# Altium PCB board_layout.pcbdoc
Units mm, origin at the board's own origin, x right, y up, seen from the top; angles counter-clockwise.
Board outline 92.15 x 89.13 mm, 2 copper layers (Top Layer, Bottom Layer), stack 1.57 mm thick; 20 components, 12 nets, 60 pads, 6 vias.
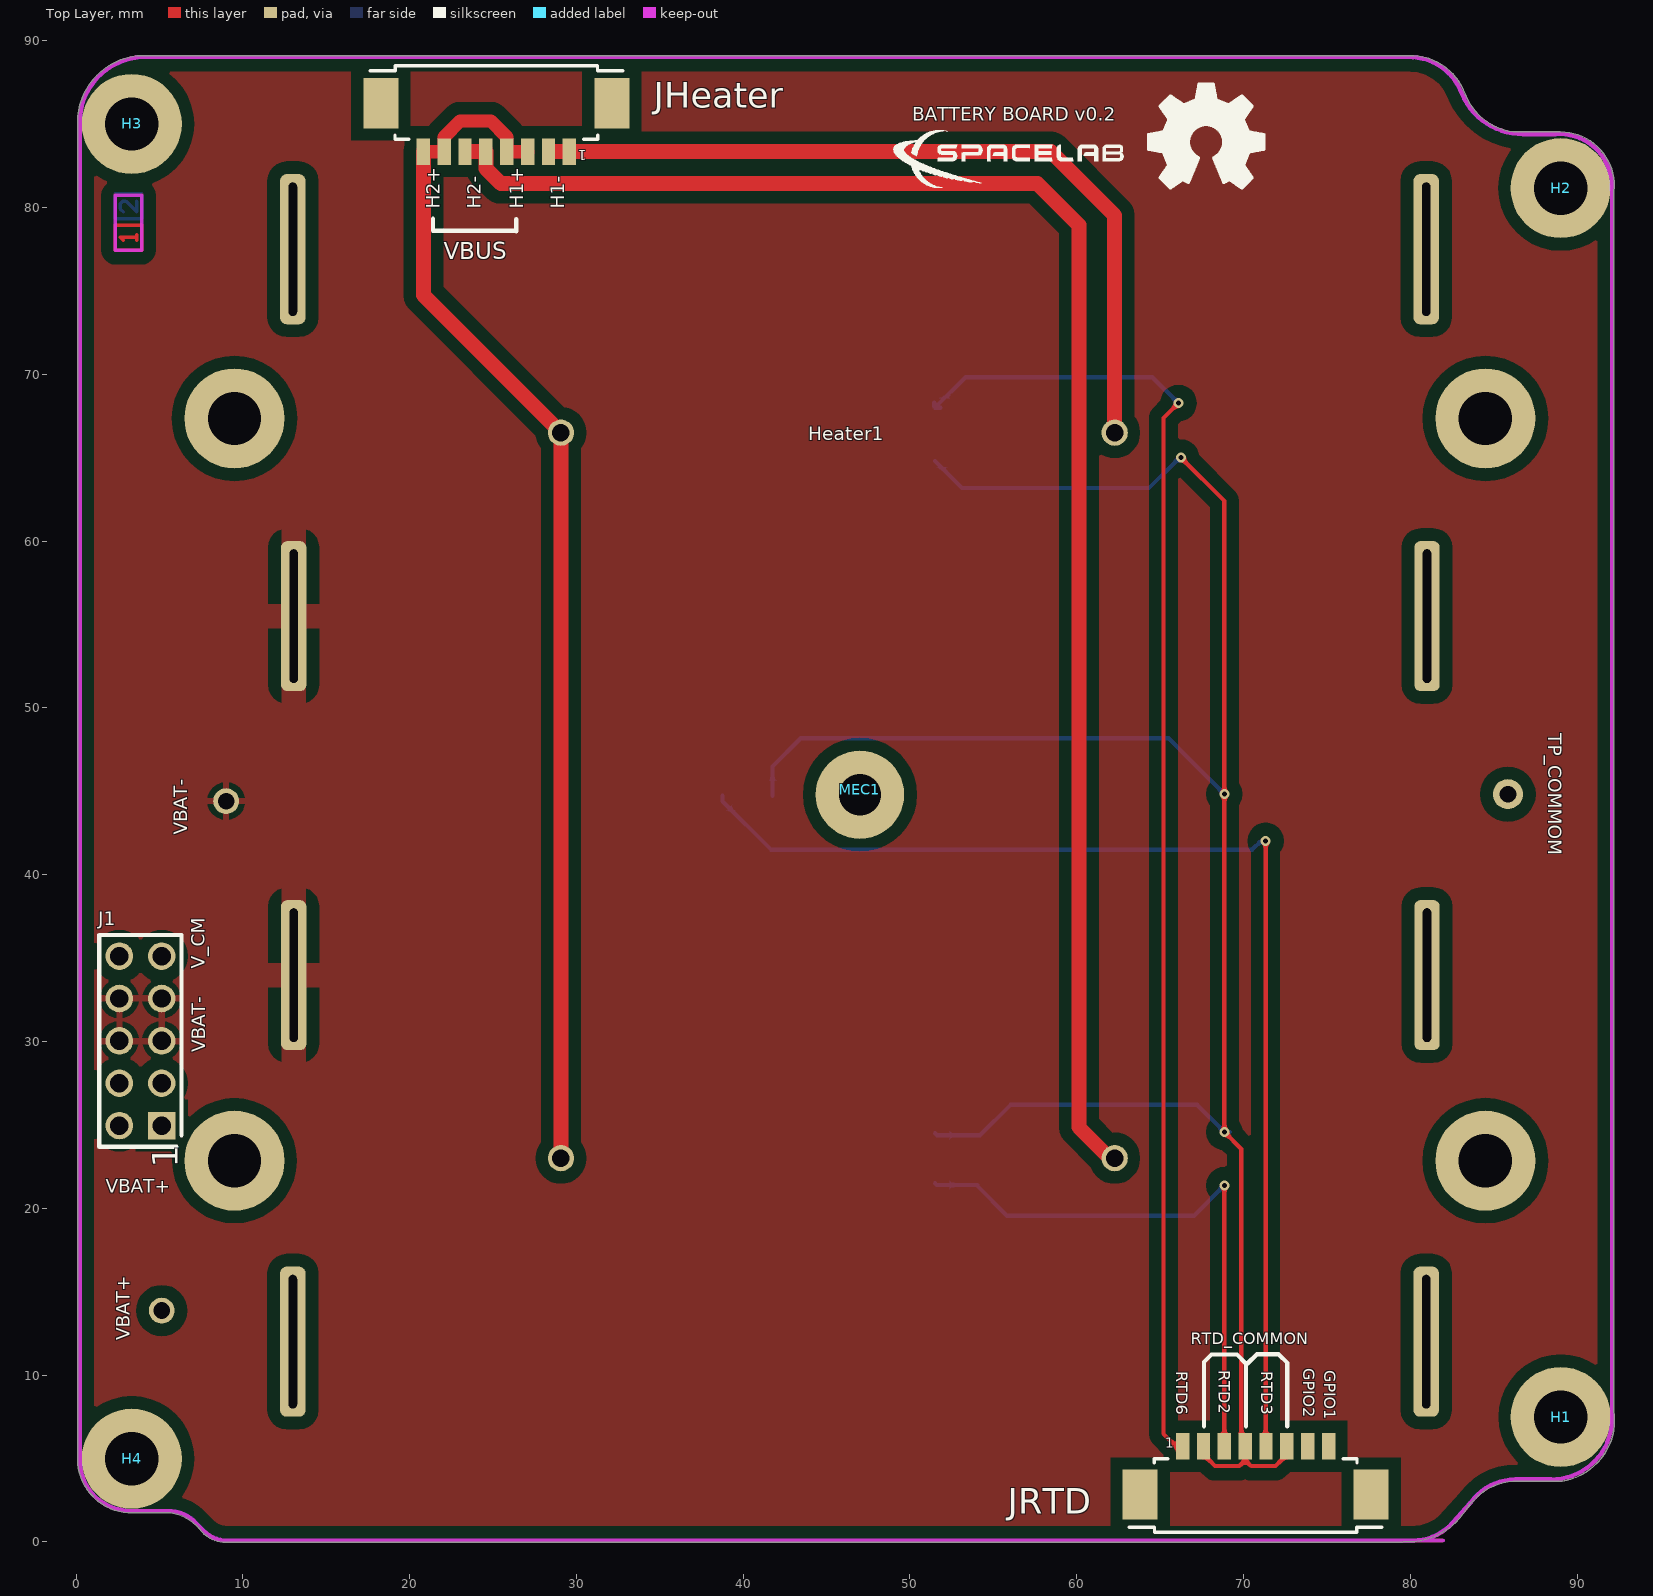
[diagram p0: Top Layer view]
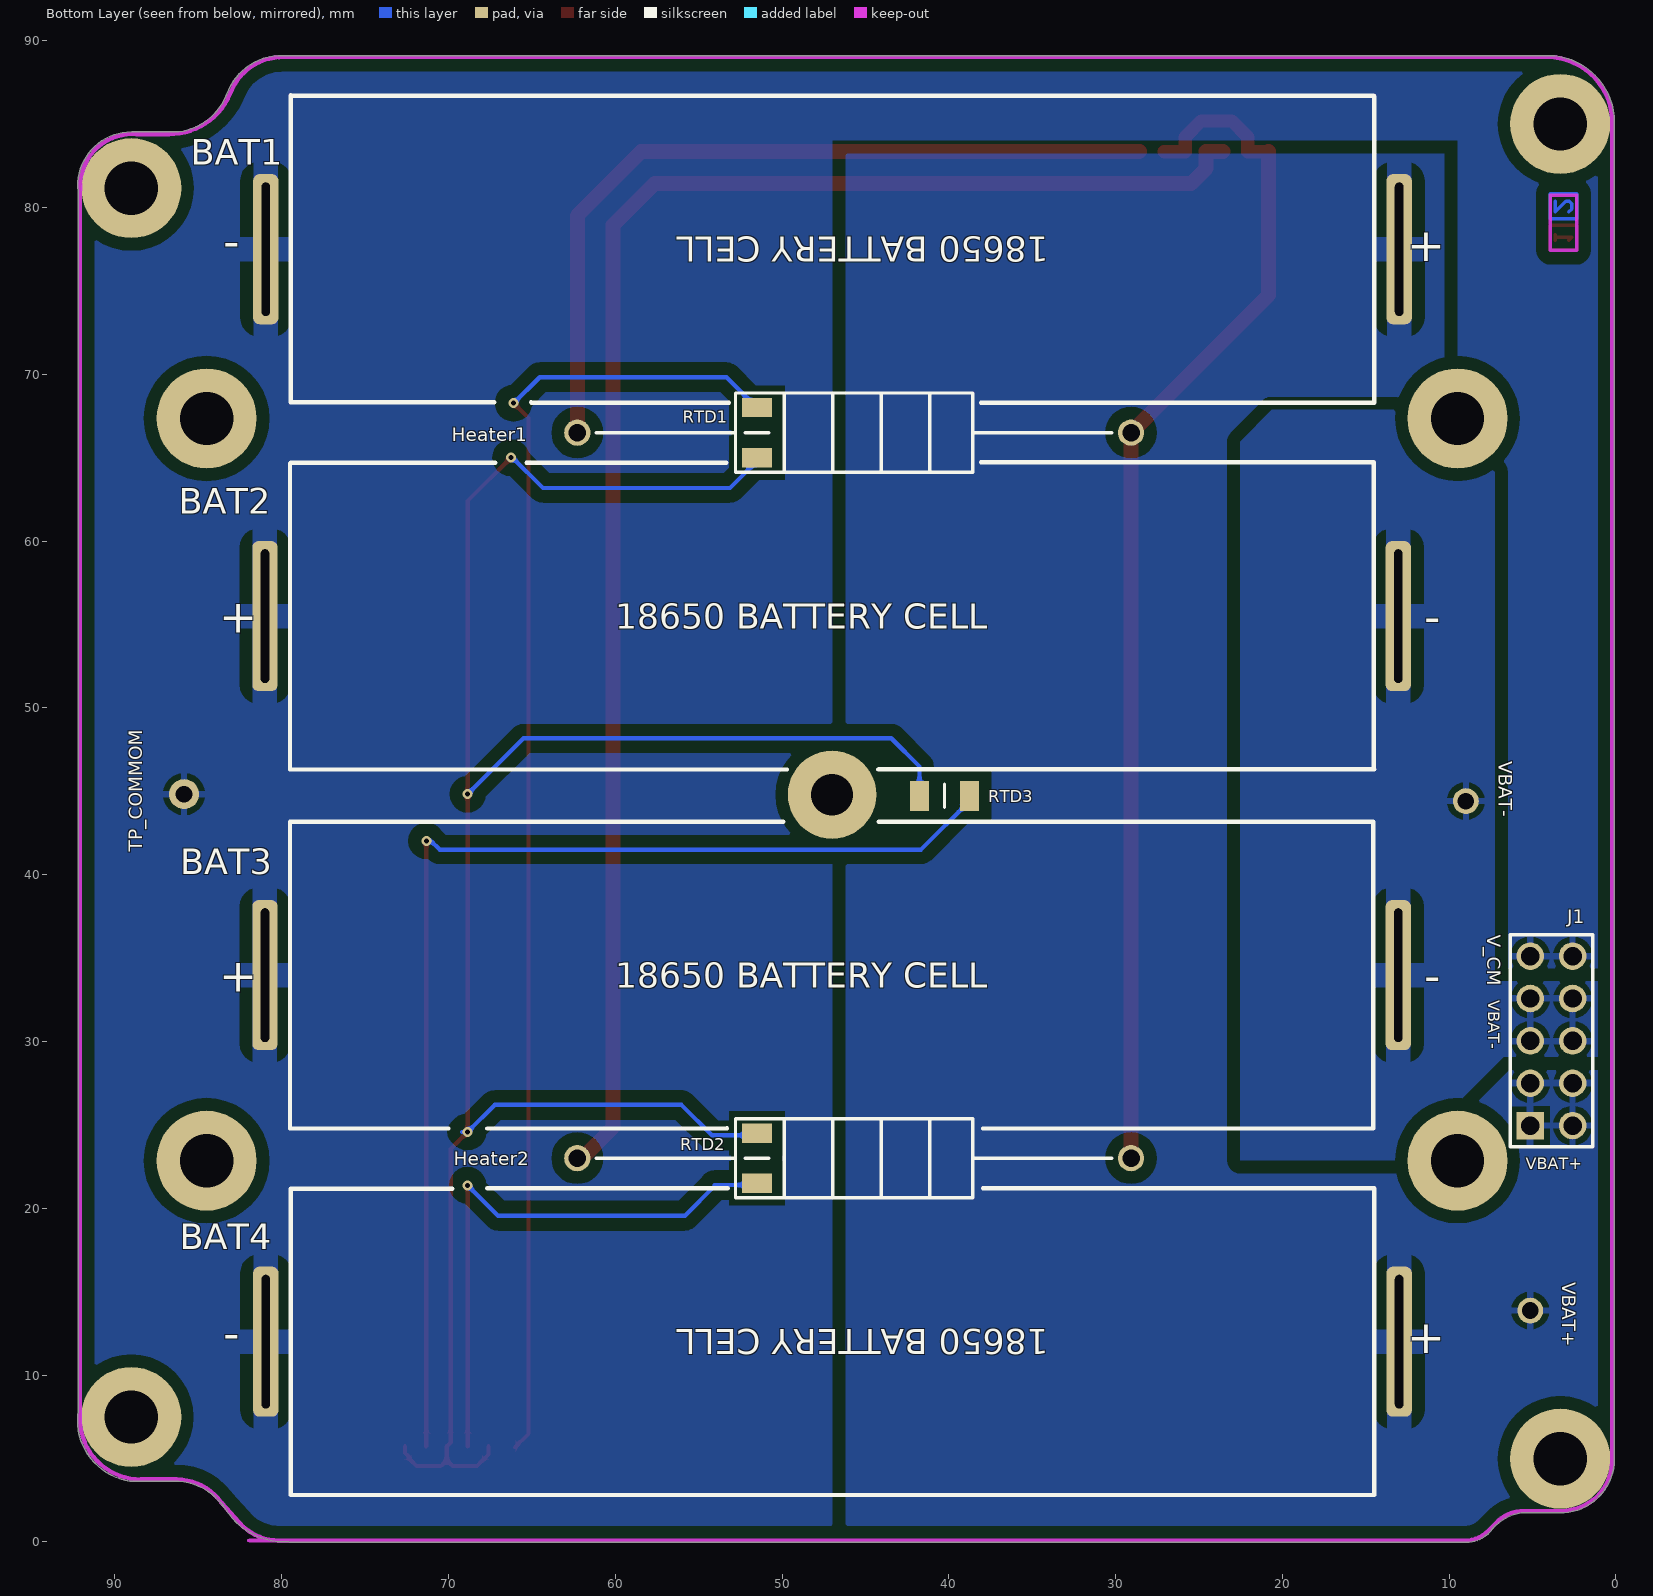
[diagram p1: Bottom Layer view, seen from below]

## Layer stack, top to bottom
Top Solder: solder mask 0.0099, Solder Resist, Dk 3.5
Top Layer: signal copper 0.0351
Dielectric Core: core 1.5001, FR-4, Dk 4.2
Bottom Layer: signal copper 0.0351
Bottom Solder: solder mask 0.0099, Solder Resist, Dk 3.5

## Board outline
92.223,81.236 92.222,81.161 cw(c92.126,81.158) 92.199,81.095 92.199,7.839 cw(c88.557,7.298) 92.239,7.296 cw(c88.535,7.296) 89.088,3.633 89.069,3.632 86.174,3.632 ccw(c86.441,-0.015) 83.352,1.942 cw(c79.812,4.185) 79.568,0.001 cw(c79.494,0.108) 79.494,-0.022 8.945,-0.022 cw(c8.923,1.795) 7.549,0.606 ccw(c5.21,-1.158) 5.689,1.732 3.369,1.732 cw(c3.342,4.982) 0.092,4.958 0.091,85.109 cw(c0.186,85.109) 0.095,85.138 cw(c4.103,85.104) 4.018,89.111 4.044,89.112 79.943,89.112 cw(c79.997,85.615) 83.289,86.794 ccw(c86.633,88.091) 86.165,84.535 88.999,84.535 cw(c88.999,81.31)

## Design rules (kind name [scope] priority, off if disabled: settings)
Clearance Clearance_polygons [All] p1: gap=0.254 ignorepadtopadclearanceinfootprint=FALSE except(0: Arc-Hole Track-Hole SMDPad-Hole THPad-Hole Via-Hole Fill-Hole Poly-Hole Region-Hole Text-Hole; 0.508: Arc-Fill Arc-Region Track-Fill Track-Region Via-Fill Via-Region Fill-Fill Fill-Poly Fill-Region Poly-Region Region-Region; 0.75: Arc-Poly Track-Poly SMDPad-Poly THPad-Poly; 0.8: Via-Poly Poly-Poly)
Clearance [All] p2: gap=0.254 ignorepadtopadclearanceinfootprint=FALSE except(0: Arc-Hole Track-Hole SMDPad-Hole THPad-Hole Via-Hole Fill-Hole Poly-Hole Region-Hole Text-Hole; 0.508: Arc-Fill Arc-Poly Arc-Region Track-Fill Track-Poly Track-Region Via-Fill Via-Poly Via-Region Fill-Fill Fill-Poly Fill-Region Poly-Poly Poly-Region Region-Region)
ComponentClearance [All] p1 off: gap=0.254 collisioncheckmode=3 verticalgap=0.254 showdistances=TRUE
HoleSize HoleSize_nickel_strips [All] p1: absolutevalues=TRUE maxlimit=10 minlimit=0.025 maxpercent=80.000 minpercent=20.000
HoleSize [All] p2: absolutevalues=TRUE maxlimit=3.81 minlimit=0.025 maxpercent=80.000 minpercent=20.000
MinimumSolderMaskSliver [All] p1: minsoldermaskwidth=0.076
PlaneClearance [All] p1: clearance=0.6
PolygonConnect PolygonConnect_nickel_strips [(ObjectKind = 'Pad') And (Layer = 'MultiLayer') And (AsMM(HoleDiameter) = 0.5) And (AsMM(PadXSize_AllLayers) = 9)] p1: thpad.connectstyle=Relief thpad.reliefconductorwidth=1.5 thpad.reliefentries=4 thpad.polygonreliefangle="90 Angle" thpad.airgapwidth=0.75 smdpad.connectstyle=Relief smdpad.reliefconductorwidth=0.254 smdpad.reliefentries=4 smdpad.polygonreliefangle="90 Angle" smdpad.airgapwidth=0.254 via.connectstyle=Relief via.reliefconductorwidth=0.254 via.reliefentries=4 via.polygonreliefangle="90 Angle" via.airgapwidth=0.254
PolygonConnect PolygonConnect_bigger [All] p2: thpad.connectstyle=Relief thpad.reliefconductorwidth=0.4 thpad.reliefentries=4 thpad.polygonreliefangle="90 Angle" thpad.airgapwidth=0.35 smdpad.connectstyle=Relief smdpad.reliefconductorwidth=0.254 smdpad.reliefentries=4 smdpad.polygonreliefangle="90 Angle" smdpad.airgapwidth=0.254 via.connectstyle=Relief via.reliefconductorwidth=0.35 via.reliefentries=4 via.polygonreliefangle="90 Angle" via.airgapwidth=0.35
PolygonConnect [All] p3: thpad.connectstyle=Relief thpad.reliefconductorwidth=0.635 thpad.reliefentries=4 thpad.polygonreliefangle="90 Angle" thpad.airgapwidth=0.381 smdpad.connectstyle=Relief smdpad.reliefconductorwidth=1.651 smdpad.reliefentries=4 smdpad.polygonreliefangle="90 Angle" smdpad.airgapwidth=0.381 via.connectstyle=Relief via.reliefconductorwidth=0.635 via.reliefentries=4 via.polygonreliefangle="90 Angle" via.airgapwidth=0.381
RoutingVias [All] p1: holewidth=0.254 width=0.508 viastyle="Through Hole" minholewidth=0.127 minwidth=0.254 maxholewidth=1.27 maxwidth=1.27
SilkToSolderMaskClearance [IsPad] p1: minsilkscreentomaskgap=0.152 clearancetoexposedcopper=TRUE
SolderMaskExpansion [All] p1: expansion=0.102
UnpouredPolygon [All] p1: allowunpoured=TRUE allowshelved=TRUE
Width [All] p1: maxlimit=1.778 minlimit=0.127 preferedwidth=0.254
24 further rules are at their usual default settings.

## Components (designator, comment, footprint, x,y, rotation, side; value= is the part's Value field where it differs from the comment)
BAT1 "18650 Battery contact strip slot" BATTERY_18650_STRIP_CONTACT 47,77.5 r270 bottom
BAT2 "18650 Battery contact strip slot" BATTERY_18650_STRIP_CONTACT 47,55.5 r90 bottom
BAT3 "18650 Battery contact strip slot" BATTERY_18650_STRIP_CONTACT 47,33.975 r90 bottom
BAT4 "18650 Battery contact strip slot" BATTERY_18650_STRIP_CONTACT 47,12 r270 bottom
H1 "M3" "M3 hole" 89.019,7.484 r0 top
H2 "M3" "M3 hole" 89.01,81.163 r0 top
H3 "M3" "M3 hole" 3.344,85.009 r0 top
H4 "M3" "M3 hole" 3.344,4.984 r0 top
Heater1 "RS02B24R00FE12" RESAD3322W86L1422D475 62.275,66.5 r180 bottom
Heater2 "RS02B24R00FE12" RESAD3322W86L1422D475 62.275,23 r180 bottom
J1 "67996-110HLF" HDRV10W64P254_2X5_1270X502X521P 5.139,24.955 r90 top
JHeater "0532610871" "PICOBLADE 8PIN RIGHT ANGLE" 25.2,84.8 r180 top
JRTD "0532610871" "PICOBLADE 8PIN RIGHT ANGLE" 70.725,4.275 r0 top
MEC1 "2.5mm battery case mount" "2.5MM HOLES BATTERY CASE MOUNT" 47,44.8 r180 top locked
RTD1 "32207595" THRMC3216X70N 51.5,66.5 r270 bottom
RTD2 "32207595" THRMC3216X70N 51.5,23 r90 bottom
RTD3 "32207595" THRMC3216X70N 40.261,44.725 r0 bottom
TP_COMMOM "TEST_POINT" Test_Point#1 85.85,44.825 r90 top
VBAT+ "TEST_POINT" Test_Point#2 5.139,13.864 r90 top
VBAT- "TEST_POINT" Test_Point#2 9,44.411 r90 top

## Footprints (in the part's own frame and the unit in brackets; to place one, negate y for a bottom-side part, rotate by r counter-clockwise, add the part's x,y. Pads: shape width x height; smd on the part's side, far side on the other; paste and mask are expansions set on the pad)
"2.5MM HOLES BATTERY CASE MOUNT" [mm]
  round 6 hole 3.2: 0(-37.5,-22.55) 0(-37.5,21.95) 0(37.5,-22.55) 0(37.5,21.95)
  round 5.3 hole 2.5: 0(0,0)
BATTERY_18650_STRIP_CONTACT [mm]
  rrect50% 9x1.524 hole 0.5 slot 8 at 0 deg: +(0,34) -(0,-33.95)
  body extent -9.19,-34.12 9.19,34.13, height 18.49
HDRV10W64P254_2X5_1270X502X521P [mm]
  rect 1.65x1.65 hole 1.1: 1(0,0)
  round 1.65 hole 1.1: 2(0,2.54) 3(2.54,0) 4(2.54,2.54) 5(5.08,0) 6(5.08,2.54) 7(7.62,0) 8(7.62,2.54) 9(10.16,0) 10(10.16,2.54)
  body extent -1.1,-1.16 11.6,3.67, height 8.28
"M3 hole" [mm]
  round 6 hole 3.2: 0(0,0)
"PICOBLADE 8PIN RIGHT ANGLE" [mm]
  rect 2.1x3 smd: 0(-6.925,-1.45) 0(6.925,-1.45)
  rect 0.8x1.6 smd: 1(-4.375,1.45) 2(-3.125,1.45) 3(-1.875,1.45) 4(-0.625,1.45) 5(0.625,1.45) 6(1.875,1.45) 7(3.125,1.45) 8(4.375,1.45)
  silkscreen extent -7.57,-3.7 7.57,0.7, body extent -7.57,-3.6 7.57,1.6, height 3.5
RESAD3322W86L1422D475 [mm]
  round 1.575 hole 1.05: 1(0,0) 2(33.2,0)
  silkscreen extent 1.14,-2.37 32.06,2.37, body extent -0.43,-2.77 33.65,2.77, height 7.04
Test_Point#1 [mm]
  round 1.8 hole 1: 1(0,0)
Test_Point#2 [mm]
  round 1.55 hole 1: 1(0,0)
THRMC3216X70N [mm]
  rect 1.15x1.8 smd: 1(-1.5,0) 2(1.5,0)
  silkscreen extent 0,-0.7 0,0.7, body extent -1.6,-0.8 1.6,0.8, height 0.7

## Part data
BAT1 BAT2 BAT3 BAT4: library part 18650_Battery_contact_strip_slot, "Slot using stip contact for 18650 batterie"
H1 H2 H3 H4: library part "M3 hole", "M3 hole"
Heater1 Heater2: "Wirewound Resistors - Through Hole 3watts 24ohms 1%", Manufacturer_Name=Vishay, Power Rating=3W, Resistance=24R, Temperature Coefficient="20ppm/ °C", Arrow Part Number=RS02B24R00FE12, Datasheet Link=https://www.vishay.com/docs/30204/rsns.pdf, Manufacturer_Part_Number=RS02B24R00FE12, Partnumber=RS02B24R00FE12
J1: "Headers & Wire Housings 2X5P UNSHRD HDR 30 microinch gold", Manufacturer_Name=SAMTEC, Mouser Part Number=649-67996-110HLF, Height=5.84mm, Manufacturer_Part_Number=67996-110HLF, Mouser Price/Stock=https://br.mouser.com/ProductDetail/?qs=zh4O8xspOuxgf2RA9jR3ZQ%3D%3D, Partnumber=67996-110HLF
JHeater JRTD: "PicoBlade 8 Position Right Angle Connector Header Surface Mount 0.049\" (1.25mm)", Color=Beige, Contact Resistance=20mR, Current Rating=1A, Flammability Rating="UL94 V-0", Insulation Resistance=100MR, Manufacturer=Molex, Manufacturer Part Number=53261-0871, Max Operating Temperature=85°C, Min Operating Temperature=-40°C, Package Quantity=1000, Supplier Part Number 1=538-53261-0871, Voltage Rating=125V, ComponentLink1Description=http://uk.rs-online.com/webdocs/13c4/0900766b813c44c3.pdf?src-supplier=RSComponents, ComponentLink1URL=http://uk.rs-online.com/webdocs/13c4/0900766b813c44c3.pdf?src-supplier=RSComponents, ComponentLink2Description=http://www.farnell.com/datasheets/1632136.pdf?src-supplier=Element14, ComponentLink2URL=http://www.farnell.com/datasheets/1632136.pdf?src-supplier=Element14, ComponentLink3Description=http://www.farnell.com/datasheets/1862905.pdf?src-supplier=Element14, ComponentLink3URL=http://www.farnell.com/datasheets/1862905.pdf?src-supplier=Element14, ComponentLink4Description=http://www.onlinecomponents.com/productFiles/mf-MOL/0532610871_pcb_headers.pdf?src-supplier=Onlinecomponents.com, ComponentLink4URL=http://www.onlinecomponents.com/productFiles/mf-MOL/0532610871_pcb_headers.pdf?src-supplier=Onlinecomponents.com, ComponentLink5Description=http://www.jameco.com/Jameco/Products/ProdDS/1932580.pdf?src-supplier=Jameco, ComponentLink5URL=http://www.jameco.com/Jameco/Products/ProdDS/1932580.pdf?src-supplier=Jameco, ComponentLink6Description=https://www.distrelec.biz/Web/Downloads/74/_e/gh116861-116874_e.pdf?mime=application%2Fpdf&src-supplier=Distrelec, ComponentLink6URL=https://www.distrelec.biz/Web/Downloads/74/_e/gh116861-116874_e.pdf?mime=application%2Fpdf&src-supplier=Distrelec, ComponentLink7Description=http://www.mouser.com/ds/2/276/0532610871_PCB_HEADERS-171054.pdf?src-supplier=Mouser, ComponentLink7URL=http://www.mouser.com/ds/2/276/0532610871_PCB_HEADERS-171054.pdf?src-supplier=Mouser, ComponentLink8Description=http://www.molex.com/webdocs/datasheets/pdf/en-us/0532610871_PCB_HEADERS.pdf?src-supplier=Avnet+Europe, ComponentLink8URL=http://www.molex.com/webdocs/datasheets/pdf/en-us/0532610871_PCB_HEADERS.pdf?src-supplier=Avnet+Europe, ComponentLink9Description=http://www.farnell.com/datasheets/1841157.pdf?src-supplier=Farnell, ComponentLink9URL=http://www.farnell.com/datasheets/1841157.pdf?src-supplier=Farnell, ComponentLink10Description=http://www.molex.com/webdocs/datasheets/pdf/en-us/0532610871_PCB_HEADERS.pdf?src-supplier=Avnet, ComponentLink10URL=http://www.molex.com/webdocs/datasheets/pdf/en-us/0532610871_PCB_HEADERS.pdf?src-supplier=Avnet, Contact Material=Bronze,Brass,Tin, Contact Plating=Tin, Gender=Male, Glow Wire Compliant=Non-compliant, Housing Material=Thermoplastic, LatestRevisionDate=17-Jul-2002, LatestRevisionNote="Re-released for DXP Platform.", Lead Free="Lead Free", Lead Pitch=1.25mm, Mount="Surface Mount", Number of Circuits=8, Number of Contacts=8, Number of Positions=8, Number of Rows=1, Orientation="Right Angle", Packaging="Tape and Reel", Partnumber=53261-0871, Pitch=1.25mm, Pricing 1="1=1.31, 10=1.15, 100=0.991, 500=0.832, 1000=0.42, 2000=0.367 (USD)", Pricing 2="1=1.64, 10=1.487, 100=1.2749, 500=1.0624 (USD)", Publisher="Altium Limited", Radiation Hardening=No, REACH SVHC=Unknown, Stock 1=13055, Stock 2=24265, Supplier 1=Mouser, Supplier 2=Digi-Key, Supplier Part Number 2=WM7626CT-ND, Termination=Solder, Voltage Rating (AC)=125V, Voltage Rating (DC)=125V, Working Voltage=125V
RTD1 RTD2 RTD3: "1 kOhms RTD Platinum (Pt) ±0.3% 3850ppm/°C 1206 (3216 Metric)", Manufacturer_Name="Heraeus Nexensos", Mouser Part Number=956-32207595, Arrow Part Number=32207595, Datasheet Link=https://componentsearchengine.com/Datasheets/1/32207595.pdf, Height=0.7mm, Manufacturer_Part_Number=32207595, Mouser Price/Stock=https://www.mouser.co.uk/ProductDetail/Heraeus-Nexensos/32207595?qs=MQgg6%252BVqoaPj6oznJNIlwg%3D%3D, Partnumber=32207595
TP_COMMOM VBAT+ VBAT-: "Test Point"
MEC1: Hole size=2.5mm

## Via types
v1: diameter 0.6, hole 0.3, Top Layer to Bottom Layer, tented both sides, 6 vias

## Nets (pads, with @x,y where several pads share a name; then routed paths per layer and width w, separated by ;. In a path a pad name is that pad's centre, name@x,y a point inside that pad or via, vN(x,y) a via of type N, cw(c..) or ccw(c..) an arc to the next point about the centre after c; other vN are vias at no path point)
+VBat: BAT1.+ BAT4.+ J1.1 J1.2 J1.3 J1.4 VBAT+.1
-Heater1_Voltage: Heater1.1 JHeater.1 JHeater.2 | length 48.3
  Top Layer w0.9: JHeater.2@28.575,83.35 JHeater.1 58.45,83.35 62.275,79.525 Heater1.1
-Heater2_Voltage: Heater2.1 JHeater.5 JHeater.6 | length 96
  Top Layer w0.9: JHeater.6@23.55,83.35 JHeater.5 24.575,82.325 25.475,81.425 57.65,81.425 60.125,78.95 60.125,64.825 60.125,24.858 61.983,23 Heater2.1
-VBat: BAT2.- BAT3.- J1.5 J1.6 J1.7 J1.8 VBAT-.1
BAT_GPIO1: JRTD.8
BAT_GPIO2: JRTD.7
RTD2: JRTD.3 RTD2.1 | length 34.6
  Top Layer w0.254: JRTD.3 v1(68.85,21.375)
  Bottom Layer w0.254: RTD2.1 51.6,21.4 54.05,21.4 ; 54.012,21.362 55.825,19.55 67.025,19.55 v1(68.85,21.375)
RTD3: JRTD.5 RTD3.1 | length 70.6
  Top Layer w0.254: v1(71.325,42.025) 71.325,5.75 JRTD.5
  Bottom Layer w0.254: RTD3.1 38.761,44.4 41.661,41.5 70.525,41.5 71.05,42.025 v1(71.325,42.025)
RTD6: JRTD.1 RTD1.1 | length 80
  Top Layer w0.254: JRTD.1@66,5.675 65.2,6.475 65.2,67.375 v1(66.1,68.275)
  Bottom Layer w0.254: RTD1.1@51.45,68.3 51.45,68.05 RTD1.1 ; RTD1.1@51.825,68 RTD1.1 ; v1@66.15,68.2 64.525,69.825 53.325,69.825 RTD1.1
RTD_common: JRTD.2 JRTD.4 JRTD.6 RTD1.2 RTD2.2 RTD3.2 | length 134.7
  Top Layer w0.254: v1(66.256,65) 68.85,62.406 v1(68.85,44.825) v1(68.85,24.575) 69.866,23.559 69.866,5.959 JRTD.4 70.1,4.9 ; JRTD.2 67.6,5.236 68.292,4.544 69.744,4.544 70.1,4.9 ; JRTD.6 72.6,5.325 72.375,5.1 72.375,5.011 71.908,4.544 70.456,4.544 70.1,4.9
  Bottom Layer w0.254: RTD3.2 41.761,46.486 43.45,48.175 65.5,48.175 v1(68.85,44.825) ; RTD2.2 51.625,24.375 54.2,24.375 56.025,26.2 67.225,26.2 v1(68.85,24.575) 69.185,24.575 ; RTD1.2@51.5,64.8 53.125,63.175 64.325,63.175 v1@66.15,65
VBat_Common: BAT1.- BAT2.+ BAT3.+ BAT4.- J1.9 J1.10 TP_COMMOM.1
VBus: Heater1.2 Heater2.2 JHeater.3 JHeater.4 JHeater.7 JHeater.8 | length 72.6
  Top Layer w0.8: JHeater.8 JHeater.7 22.075,84.225 23.04,85.19 24.86,85.19 25.825,84.225 JHeater.4 JHeater.3
  Top Layer w0.9: JHeater.8 20.825,74.75 Heater1.2 Heater2.2
pads on no net: H1.0 H2.0 H3.0 H4.0 JHeater.0 JRTD.0 MEC1.0
copper on no net: | length 16.6
  Top Layer w0.2: 2.822,78.035 2.647,78.21 3.647,78.21 ; 3.647,78.035 3.647,78.21 ; 3.647,78.385 3.647,78.21 ; 2.347,77.435 2.347,78.935 3.947,78.935 3.947,77.435 2.347,77.435
  Bottom Layer w0.2: 2.822,79.735 2.647,79.91 2.647,80.235 2.797,80.385 2.997,80.385 3.647,79.735 3.647,80.385 ; 2.347,79.335 2.347,80.835 3.947,80.835 3.947,79.335 2.347,79.335

## Polygon pours and split planes (outlines as drawn)
-VBat on Bottom Layer "-VBAT_L02_P110" (solid, remove dead copper, pour order 110): 7.28,67.861 20.64,67.861 22.53,65.947 22.53,22.875 12.927,22.875 6.721,29.081 0.281,29.081 0.265,33.596 7.28,33.596 7.28,42.359
VBat_Common on Bottom Layer "VBAT_COMMON_L02_P134" (solid, remove dead copper, pour order 134): 37.905,89.62 37.807,89.522 4.353,89.522 ccw(c4.353,85.5) 0.332,85.5 0.332,33.975 6.685,33.975 7.549,67.243 cw(c10.012,66.158) 9.5,68.801 9.5,84.025 46.99,84.025 46.974,0.45 79.609,0.478 81.503,0.478 85.158,4.133 90.21,4.133 92.314,6.237 92.314,83.149 90.421,85.042 85.655,85.042 81.068,89.629 79.609,89.629
+VBat on Bottom Layer "+VBAT_L02_P138" (solid, remove dead copper, pour order 138): 8.939,85.138 47.001,85.138 47.001,-0.022 8.177,-0.022 6.423,1.732 2.144,1.732 0.094,3.782 0.127,8.027 0.096,8.058 0.124,28.454 9.715,28.454 14.766,23.403 22.991,23.403 23.008,65.428 20.567,67.861 8.94,67.861
-VBat on Top Layer "-VBAT_L01_P139" (solid, pour order 139): 7.575,0.611 cw(c7.673,0.692) 7.573,0.613 ccw(c5.111,-1.317) 5.691,1.757 3.111,1.757 cw(c3.111,1.884) 3.105,1.757 cw(c3.242,4.883) 0.119,4.692 cw(c0.246,4.7) 0.119,4.7 0.119,85.179 cw(c0.246,85.179) 0.12,85.201 cw(c0.247,85.211) 0.12,85.212 cw(c4.061,85.179) 3.901,89.117 cw(c3.906,88.99) 3.906,89.117 80.176,89.117 cw(c80.176,88.99) 80.183,89.117 cw(c79.993,85.58) 83.276,86.91 cw(c83.186,86.82) 83.306,86.862 ccw(c86.571,88.008) 86.321,84.557 88.958,84.557 cw(c88.958,84.43) 88.996,84.551 cw(c88.958,81.292) 92.218,81.301 cw(c92.09,81.301) 92.218,81.301 92.218,7.22 cw(c88.664,7.193) 92.218,7.193 cw(c88.664,7.193) 88.691,3.639 cw(c88.69,3.766) 88.69,3.639 86.388,3.639 cw(c86.388,3.766) 86.376,3.639 ccw(c86.388,0.083) 83.473,2.12 cw(c79.622,4.498) 81.126,0.229 81.276,0.229 cw(c81.276,0.102) 81.403,0.102 cw(c81.276,0.102) 81.276,-0.026 79.77,-0.026 cw(c79.622,4.498) 79.474,-0.026 9.05,-0.026 cw(c9.05,0.102) 9.023,-0.023 cw(c8.996,0.102) 9.001,-0.026 cw(c8.93,1.732)

## Keep-outs
Keep-Out Layer:
  lines w0.2: 2.347,77.435 3.947,77.435 3.947,80.735 2.347,80.735 2.347,77.435
  lines w0.254: 0.217,4.888 0.217,85.286 cw(c4.172,85.07) 4.227,89.031 ; 0.228,4.8 ccw(c3.245,4.888) 2.959,1.883 ; 2.986,1.856 5.552,1.856 ; 4.172,89.022 79.853,89.022 cw(c79.931,85.659) 83.096,86.798 ccw(c86.745,88.357) 86.768,84.389 ; 5.481,1.854 cw(c5.552,-0.367) 7.065,1.261 ; 7.063,1.259 7.642,0.68 ccw(c9.046,2.012) 9.108,0.077 81.949,0.077 ; 80.176,0.079 ccw(c80.149,3.299) 82.303,0.905 ; 82.307,0.902 83.596,2.331 83.596,2.337 ; 83.601,2.334 cw(c86.314,0.439) 86.286,3.748 88.442,3.748 ; 86.745,84.394 88.7,84.394 cw(c88.932,81.25) 92.081,81.084 ; 88.442,3.739 ccw(c88.454,7.382) 92.093,7.549 92.093,81.084

## Other copper
Top Layer:
  text "'.Layer_Name'" at 164.701,-36.967 h2.5
Bottom Layer:
  pour cut-out: 53.05,24.25 53.05,22.025 49.975,22.025 49.975,22.3 49.975,24.25
  pour cut-out: 49.95,65.675 49.95,67.9 53.025,67.9 53.025,67.625 53.025,65.675
  pour cut-out: 39.35,46.375 41.575,46.375 41.575,43.3 41.3,43.3 39.35,43.3
  text "'.Layer_Name'" at 164.701,-36.967 h2.5

## Silkscreen, mask and mechanical layers (free items; w line width, h text height)
Top Overlay:
  drawing of 999 lines, arcs and shapes, not listed
  text "BATTERY BOARD v0.2" at 50.126,85.207 h0.81
  text "H2+" at 21.796,79.924 h0.81 r90
  text "H2-" at 24.271,79.924 h0.81 r90
  text "H1+" at 26.807,79.924 h0.81 r90
  text "H1-" at 29.266,79.924 h0.81 r90
  text "VBUS" at 22.05,76.9 h1
  text "Heater1" at 43.91,66.058 h0.81
  text "V_CM" at 7.73,34.351 h0.81 r90
  text "VBAT-" at 7.746,29.35 h0.81 r90
  text "VBAT+" at 1.775,20.925 h0.81
  text "RTD_COMMON" at 66.825,11.85 h0.7
  text "GPIO2" at 73.575,10.4 h0.7 r270
  text "RTD2" at 68.5,10.275 h0.7 r270
  text "GPIO1" at 74.825,10.275 h0.7 r270
  text "RTD6" at 65.975,10.225 h0.7 r270
  text "RTD3" at 71.075,10.225 h0.7 r270
  text "'.Layer_Name'" at 164.701,-36.967 h2.5
Bottom Overlay:
  lines w0.203: 1.389,23.684 6.35,23.684 6.35,36.389 1.389,36.389 1.389,23.684
  lines w0.254: 37.95,21.2 14.5,21.2 14.5,2.8 79.45,2.8 79.45,21.175 69.775,21.175 ; 37.95,24.775 14.55,24.775 14.55,43.175 44.2,43.175 ; 38.075,64.725 14.525,64.725 14.525,46.35 14.5,46.325 44.2,46.325 44.225,46.3 ; 38.075,68.3 14.5,68.3 14.5,86.675 14.525,86.7 79.425,86.7 79.45,86.725 79.45,68.35 79.475,68.325 67.25,68.325 ; 49.7,46.3 79.5,46.3 79.5,64.65 79.45,64.7 67.2,64.7 ; 49.925,43.175 79.5,43.175 79.5,31.625 79.5,24.775 70,24.775 ; 53.175,68.3 65.025,68.3 65.05,68.325 ; 53.25,21.2 67.675,21.2 ; 53.3,24.775 53.3,24.8 ; 53.325,24.775 67.675,24.775 ; 53.35,64.7 65.325,64.7
  text "VBAT-" at 7.025,46.8 h0.81 r90
  text "TP_COMMOM" at 88.35,41.375 h0.81 r270
  text "J1" at 2.925,37.1 h0.81
  text "V_CM" at 7.725,36.4 h0.81 r90
  text "VBAT-" at 7.65,32.475 h0.7 r90
  text "VBAT+" at 5.4,22.35 h0.7
  text "VBAT+" at 3.225,15.575 h0.81 r90
  text "'.Layer_Name'" at 164.701,-36.967 h2.5
Top Paste:
  text "'.Layer_Name'" at 164.701,-36.967 h2.5
Bottom Paste:
  text "'.Layer_Name'" at 164.701,-36.967 h2.5
Top Solder:
  region: 4.147,77.235 4.147,80.935 2.147,80.935 2.147,77.235
  lines w0.2: 2.147,77.435 ccw(c2.347,77.435) 2.347,77.235 3.947,77.235 ccw(c3.947,77.435) 4.147,77.435 4.147,80.735 ccw(c3.947,80.735) 3.947,80.935 2.347,80.935 ccw(c2.347,80.735) 2.147,80.735 2.147,77.435
  text "'.Layer_Name'" at 164.701,-36.967 h2.5
Bottom Solder:
  region: 4.147,77.235 4.147,80.935 2.147,80.935 2.147,77.235
  lines w0.2: 2.147,77.435 ccw(c2.347,77.435) 2.347,77.235 3.947,77.235 ccw(c3.947,77.435) 4.147,77.435 4.147,80.735 ccw(c3.947,80.735) 3.947,80.935 2.347,80.935 ccw(c2.347,80.735) 2.147,80.735 2.147,77.435
  text "'.Layer_Name'" at 164.701,-36.967 h2.5
Drill Guide:
  text "'.Layer_Name'" at 164.701,-36.967 h2.5
3D Body:
  text "'.Layer_Name'" at 164.731,-37.012 h2.5
Dimension:
  text "'.Layer_Name'" at 164.701,-36.967 h2.5
Mechanical 3:
  text "'.Layer_Name'" at 136.093,-84.499 h2.5
Mechanical 4:
  lines w0.254: 44.075,46.325 14.5,46.325 14.5,57.875 14.5,64.725 65.223,64.725 ; 49.8,46.325 79.45,46.325 79.45,64.725 67.212,64.725
  text "'.Layer_Name'" at 136.073,-84.519 h2.5
Mechanical 5:
  text "'.Layer_Name'" at 136.073,-84.519 h2.5
Board Edge:
  lines w0.254: 0.246,85.179 0.246,4.7 ccw(c3.242,4.883) 3.111,1.884 5.703,1.884 cw(c5.111,-1.317) 7.673,0.692 ccw(c8.93,1.732) 8.996,0.102 ; 0.247,85.211 cw(c4.061,85.179) 3.906,88.99 4.446,88.99 80.176,88.99 cw(c79.993,85.58) 83.186,86.79 ; 9.05,0.102 81.276,0.102 ; 79.476,0.102 ccw(c79.622,4.498) 83.366,2.19 cw(c86.388,0.083) 86.452,3.766 ; 83.186,86.82 ccw(c86.571,88.008) 86.316,84.43 88.958,84.43 ; 86.388,3.766 88.69,3.766 ccw(c88.664,7.193) 92.09,7.22 92.09,81.301 ccw(c88.958,81.292) 88.986,84.424
  text "'.Layer_Name'" at 180.925,-36.825 h2.5
ASM Bottom:
  text "'.Layer_Name'" at 164.731,-36.962 h2.5
ASM Top:
  text "'.Layer_Name'" at 164.701,-36.967 h2.5
Sheet:
  drawing of 228 lines, arcs and shapes, not listed
  text "1" at -3.72,136.169 h1.78
  text "2" at 68.924,136.169 h1.78
  text "3" at 142.076,136.169 h1.78
  text "4" at 214.974,136.169 h1.78
  text "A" at -38.061,113.156 h1.78
  text "A" at 248.959,113.156 h1.78
  text "Layer" at 118.658,98.281 h1.52
  text "Name" at 129.07,98.281 h1.52
  text "Material" at 153.955,98.281 h1.52
  text "Thickness" at 175.793,98.281 h1.52
  text "Constant" at 192.299,98.281 h1.52
  text "Board Layer Stack" at 206.773,98.281 h1.52
  text "1" at 118.658,95.233 h1.52
  text "Top Overlay" at 129.07,95.233 h1.52
  text "2" at 118.658,92.185 h1.52
  text "Top Solder" at 129.07,92.185 h1.52
  text "Solder Resist" at 153.955,92.185 h1.52
  text "0.010mm" at 175.793,92.185 h1.52
  text "3.5" at 192.299,92.185 h1.52
  text "3" at 118.658,89.137 h1.52
  text "Top Layer" at 129.07,89.137 h1.52
  text "Copper" at 153.955,89.137 h1.52
  text "0.035mm" at 175.793,89.137 h1.52
  text "4" at 118.658,86.089 h1.52
  text "Dielectric Core" at 129.07,86.089 h1.52
  text "FR-4" at 153.955,86.089 h1.52
  text "1.500mm" at 175.793,86.089 h1.52
  text "4.2" at 192.299,86.089 h1.52
  text "5" at 118.658,83.041 h1.52
  text "Bottom Layer" at 129.07,83.041 h1.52
  text "Copper" at 153.955,83.041 h1.52
  text "0.035mm" at 175.793,83.041 h1.52
  text "6" at 118.658,79.993 h1.52
  text "Bottom Solder" at 129.07,79.993 h1.52
  text "Solder Resist" at 153.955,79.993 h1.52
  text "0.010mm" at 175.793,79.993 h1.52
  text "3.5" at 192.299,79.993 h1.52
  text "7" at 118.658,76.945 h1.52
  text "Bottom Overlay" at 129.07,76.945 h1.52
  text "B" at -38.061,65.1 h1.78
  text "B" at 248.959,65.1 h1.78
  text "Fabrication specifications:" at 117.741,29.171 h3.1
  text "C" at -38.061,16.586 h1.78
  text "C" at 248.959,16.586 h1.78
  text "- Copper base 1OZ:  / - PCB Material: Prepeg FR4-Standard / - PCB Tickness: 1.6mm / - PCB Surface: HASL (with lead)" at 117.735,12.187 h1.73
  text "- Silkscreen Color: White (top and bottom) / - Soldermask Color: Green / - Vias: Force Complete Tenting / - Stack-up (herein included)" at 175.435,12.187 h1.73
  text "Assembly specifications:" at 118.016,6.191 h3.1
  text "- Solder composition: Include lead / - Fiducials: 3 top and 3 bottom avaliable / - Check BOM for not placed components" at 118.01,-10.803 h1.73
  text "SpaceLab - Federal University of Santa Catarina" at 158.034,-27.442 h2.5
  text "D" at -38.061,-31.42 h1.78
  text "D" at 248.959,-31.42 h1.78
  text "Project:" at 158.034,-31.942 h2.5
  text "Battery Board 4 cells" at 166.034,-31.942 h2.5
  text "Layer:" at 158.034,-36.942 h2.5
  text "Designed by:" at 158.034,-41.942 h2.5
  text "Project Code:" at 216.034,-41.942 h2.5
  text "BAT4C" at 230.534,-41.942 h2.5
  text "Amanda B. Medeiros (based on FSat-I Bat)" at 171.96,-41.975 h2.5
  text "v0.2" at 196.06,-46.875 h2.5
  text "Date:" at 158.034,-46.942 h2.5
  text "'.Print_Date'" at 164.034,-46.942 h2.5
  text "Version:" at 187.034,-46.942 h2.5
  text "Size:" at 216.034,-46.942 h2.5
  text "A4" at 222.034,-46.942 h2.5
  text "1" at -3.72,-51.791 h1.78
  text "2" at 68.924,-51.791 h1.78
  text "3" at 142.076,-51.791 h1.78
  text "4" at 214.974,-51.791 h1.78
Drill Drawing:
  circle w0.254: c118.922,56.757 r0.675
  lines w0.254: 118.247,50.003 119.598,50.003 119.598,51.354 118.247,51.354 118.247,50.003 ; 118.247,53.718 118.922,53.042 119.598,53.718 118.922,54.393 118.247,53.718 ; 118.247,59.121 118.247,59.458 118.585,59.796 118.247,60.134 118.247,60.472 118.585,60.472 118.922,60.134 119.26,60.472 119.598,60.472 119.598,60.134 119.26,59.796 119.598,59.458 119.598,59.121 119.26,59.121 118.922,59.458 118.585,59.121 118.247,59.121 ; 118.247,63.511 119.598,63.511 118.922,62.16 118.247,63.511 ; 118.247,65.199 118.922,65.537 119.598,65.199 119.26,65.875 119.598,66.55 118.922,66.212 118.247,66.55 118.585,65.875 118.247,65.199 ; 118.247,68.576 118.585,68.576 118.585,68.238 119.26,68.238 119.26,68.576 119.598,68.576 119.598,69.251 119.26,69.251 119.26,69.589 118.585,69.589 118.585,69.251 118.247,69.251 118.247,68.576
  lines w0.381: 117.019,49.091 231.742,49.091 ; 117.019,70.366 231.742,70.366 ; 128.345,46.052 128.345,73.405 ; 139.386,46.052 139.386,73.405 ; 162.783,46.052 162.783,73.405 ; 173.197,46.052 173.197,73.405 ; 188.229,46.052 188.229,73.405 ; 218.715,46.052 218.715,73.405 ; 117.019,46.052 231.742,46.052 231.742,73.405 117.019,73.405 117.019,46.052
  text "Symbol" at 118.843,71.278 h1.46
  text "Count" at 129.257,71.278 h1.46
  text "Hole Size" at 140.298,71.278 h1.46
  text "Plated" at 163.695,71.278 h1.46
  text "Hole Type" at 174.109,71.278 h1.46
  text "Drill Layer Pair" at 189.141,71.278 h1.46
  text "Via/Pad" at 219.626,71.278 h1.46
  text "1" at 129.257,68.238 h1.22
  text "2.500mm (98.43mil)" at 140.298,68.238 h1.22
  text "PTH" at 163.695,68.238 h1.22
  text "Round" at 174.109,68.238 h1.22
  text "Top Layer - Bottom Layer" at 189.141,68.238 h1.22
  text "Pad" at 219.626,68.238 h1.22
  text "3" at 129.257,65.199 h1.22
  text "1.000mm (39.37mil)" at 140.298,65.199 h1.22
  text "PTH" at 163.695,65.199 h1.22
  text "Round" at 174.109,65.199 h1.22
  text "Top Layer - Bottom Layer" at 189.141,65.199 h1.22
  text "Pad" at 219.626,65.199 h1.22
  text "4" at 129.257,62.16 h1.22
  text "1.050mm (41.34mil)" at 140.298,62.16 h1.22
  text "PTH" at 163.695,62.16 h1.22
  text "Round" at 174.109,62.16 h1.22
  text "Top Layer - Bottom Layer" at 189.141,62.16 h1.22
  text "Pad" at 219.626,62.16 h1.22
  text "6" at 129.257,59.121 h1.22
  text "0.300mm (11.81mil)" at 140.298,59.121 h1.22
  text "PTH" at 163.695,59.121 h1.22
  text "Round" at 174.109,59.121 h1.22
  text "Top Layer - Bottom Layer" at 189.141,59.121 h1.22
  text "Via" at 219.626,59.121 h1.22
  text "8" at 129.257,56.082 h1.22
  text "0.500mm (19.69mil)" at 140.298,56.082 h1.22
  text "PTH" at 163.695,56.082 h1.22
  text "Slot" at 174.109,56.082 h1.22
  text "Top Layer - Bottom Layer" at 189.141,56.082 h1.22
  text "Pad" at 219.626,56.082 h1.22
  text "8" at 129.257,53.042 h1.22
  text "3.200mm (125.98mil)" at 140.298,53.042 h1.22
  text "PTH" at 163.695,53.042 h1.22
  text "Round" at 174.109,53.042 h1.22
  text "Top Layer - Bottom Layer" at 189.141,53.042 h1.22
  text "Pad" at 219.626,53.042 h1.22
  text "10" at 129.257,50.003 h1.22
  text "1.100mm (43.31mil)" at 140.298,50.003 h1.22
  text "PTH" at 163.695,50.003 h1.22
  text "Round" at 174.109,50.003 h1.22
  text "Top Layer - Bottom Layer" at 189.141,50.003 h1.22
  text "Pad" at 219.626,50.003 h1.22
  text "40 Total" at 129.257,46.964 h1.22
  text "Slot definitions :" at 118.843,43.924 h1.22
  text "Routed Path Length" at 139.91,43.924 h1.22
  text "= Calculated from tool start centre position to tool end centre position." at 162.396,43.924 h1.22
  text "Hole Length" at 139.91,41.796 h1.22
  text "= Routed Path Length + Tool Size = Slot length as defined in the PCB layout" at 154.091,41.796 h1.22
  text "'.Layer_Name'" at 164.701,-36.967 h2.5
  text "'.Layer_Name'" at 164.701,-36.967 h2.5

## Dimensions
86.066,84.515 to 92.241,89.1 on Dimension
76.241,-0.05 to 73.466,89.1 on Dimension
92.289,81.142 to 73.466,89.1 on Dimension
-0.009,4.725 to 8.716,-0.075 on Dimension
8.716,-0.075 to 74.288,-0.205 on Dimension
-0.009,4.725 to 92.118,5.575 on Dimension
74.288,-0.005 to 92.118,7.554 on Dimension
74.196,-0.044 to 88.822,3.733 on Dimension
88.75,3.711 to 8.716,-0.075 on Dimension
91.18,3.724 to 92.289,81.142 on Dimension

## Text inside footprints (layer, text, board x,y; h text height)
BAT1: Bottom Overlay "-" at 82.5,78.5 h2 r180; Bottom Overlay "+" at 10.25,78.5 h2 r180; Bottom Overlay "18650 BATTERY CELL" at 34,78.25 h1.5 r180; ASM Bottom "+" at 10.25,78.5 h2 r180; ASM Bottom "-" at 82.5,78.5 h2 r180
BAT2: Bottom Overlay "18650 BATTERY CELL" at 60,54.75 h1.5; Bottom Overlay "+" at 83.75,54.5 h2; Bottom Overlay "-" at 11.5,54.5 h2; ASM Bottom "-" at 11.5,54.5 h2; ASM Bottom "+" at 83.75,54.5 h2
BAT3: Bottom Overlay "-" at 11.5,32.975 h2; Bottom Overlay "+" at 83.75,32.975 h2; Bottom Overlay "18650 BATTERY CELL" at 60,33.225 h1.5; ASM Bottom "+" at 83.75,32.975 h2; ASM Bottom "-" at 11.5,32.975 h2
BAT4: Bottom Overlay "18650 BATTERY CELL" at 34,12.75 h1.5 r180; Bottom Overlay "+" at 10.25,13 h2 r180; Bottom Overlay "-" at 82.5,13 h2 r180; ASM Bottom "-" at 82.5,13 h2 r180; ASM Bottom "+" at 10.25,13 h2 r180
J1: Top Overlay "1" at 6.089,22.43 h1.52 r90
JHeater: Top Overlay "1" at 30.625,83.65 h1 r180
JRTD: Top Overlay "1" at 65.3,5.425 h1